# Altium PCB TG21_TX_Ma tran phim.PcbDoc (part 3 of 3)
Units mm, origin at the board's own origin, x right, y up, seen from the top; angles counter-clockwise.
Board outline 300 x 226.6 mm, 2 copper layers (Top Layer, Bottom Layer), stack 1.581 mm thick; 245 components, 229 nets, 914 pads, 4790 vias.
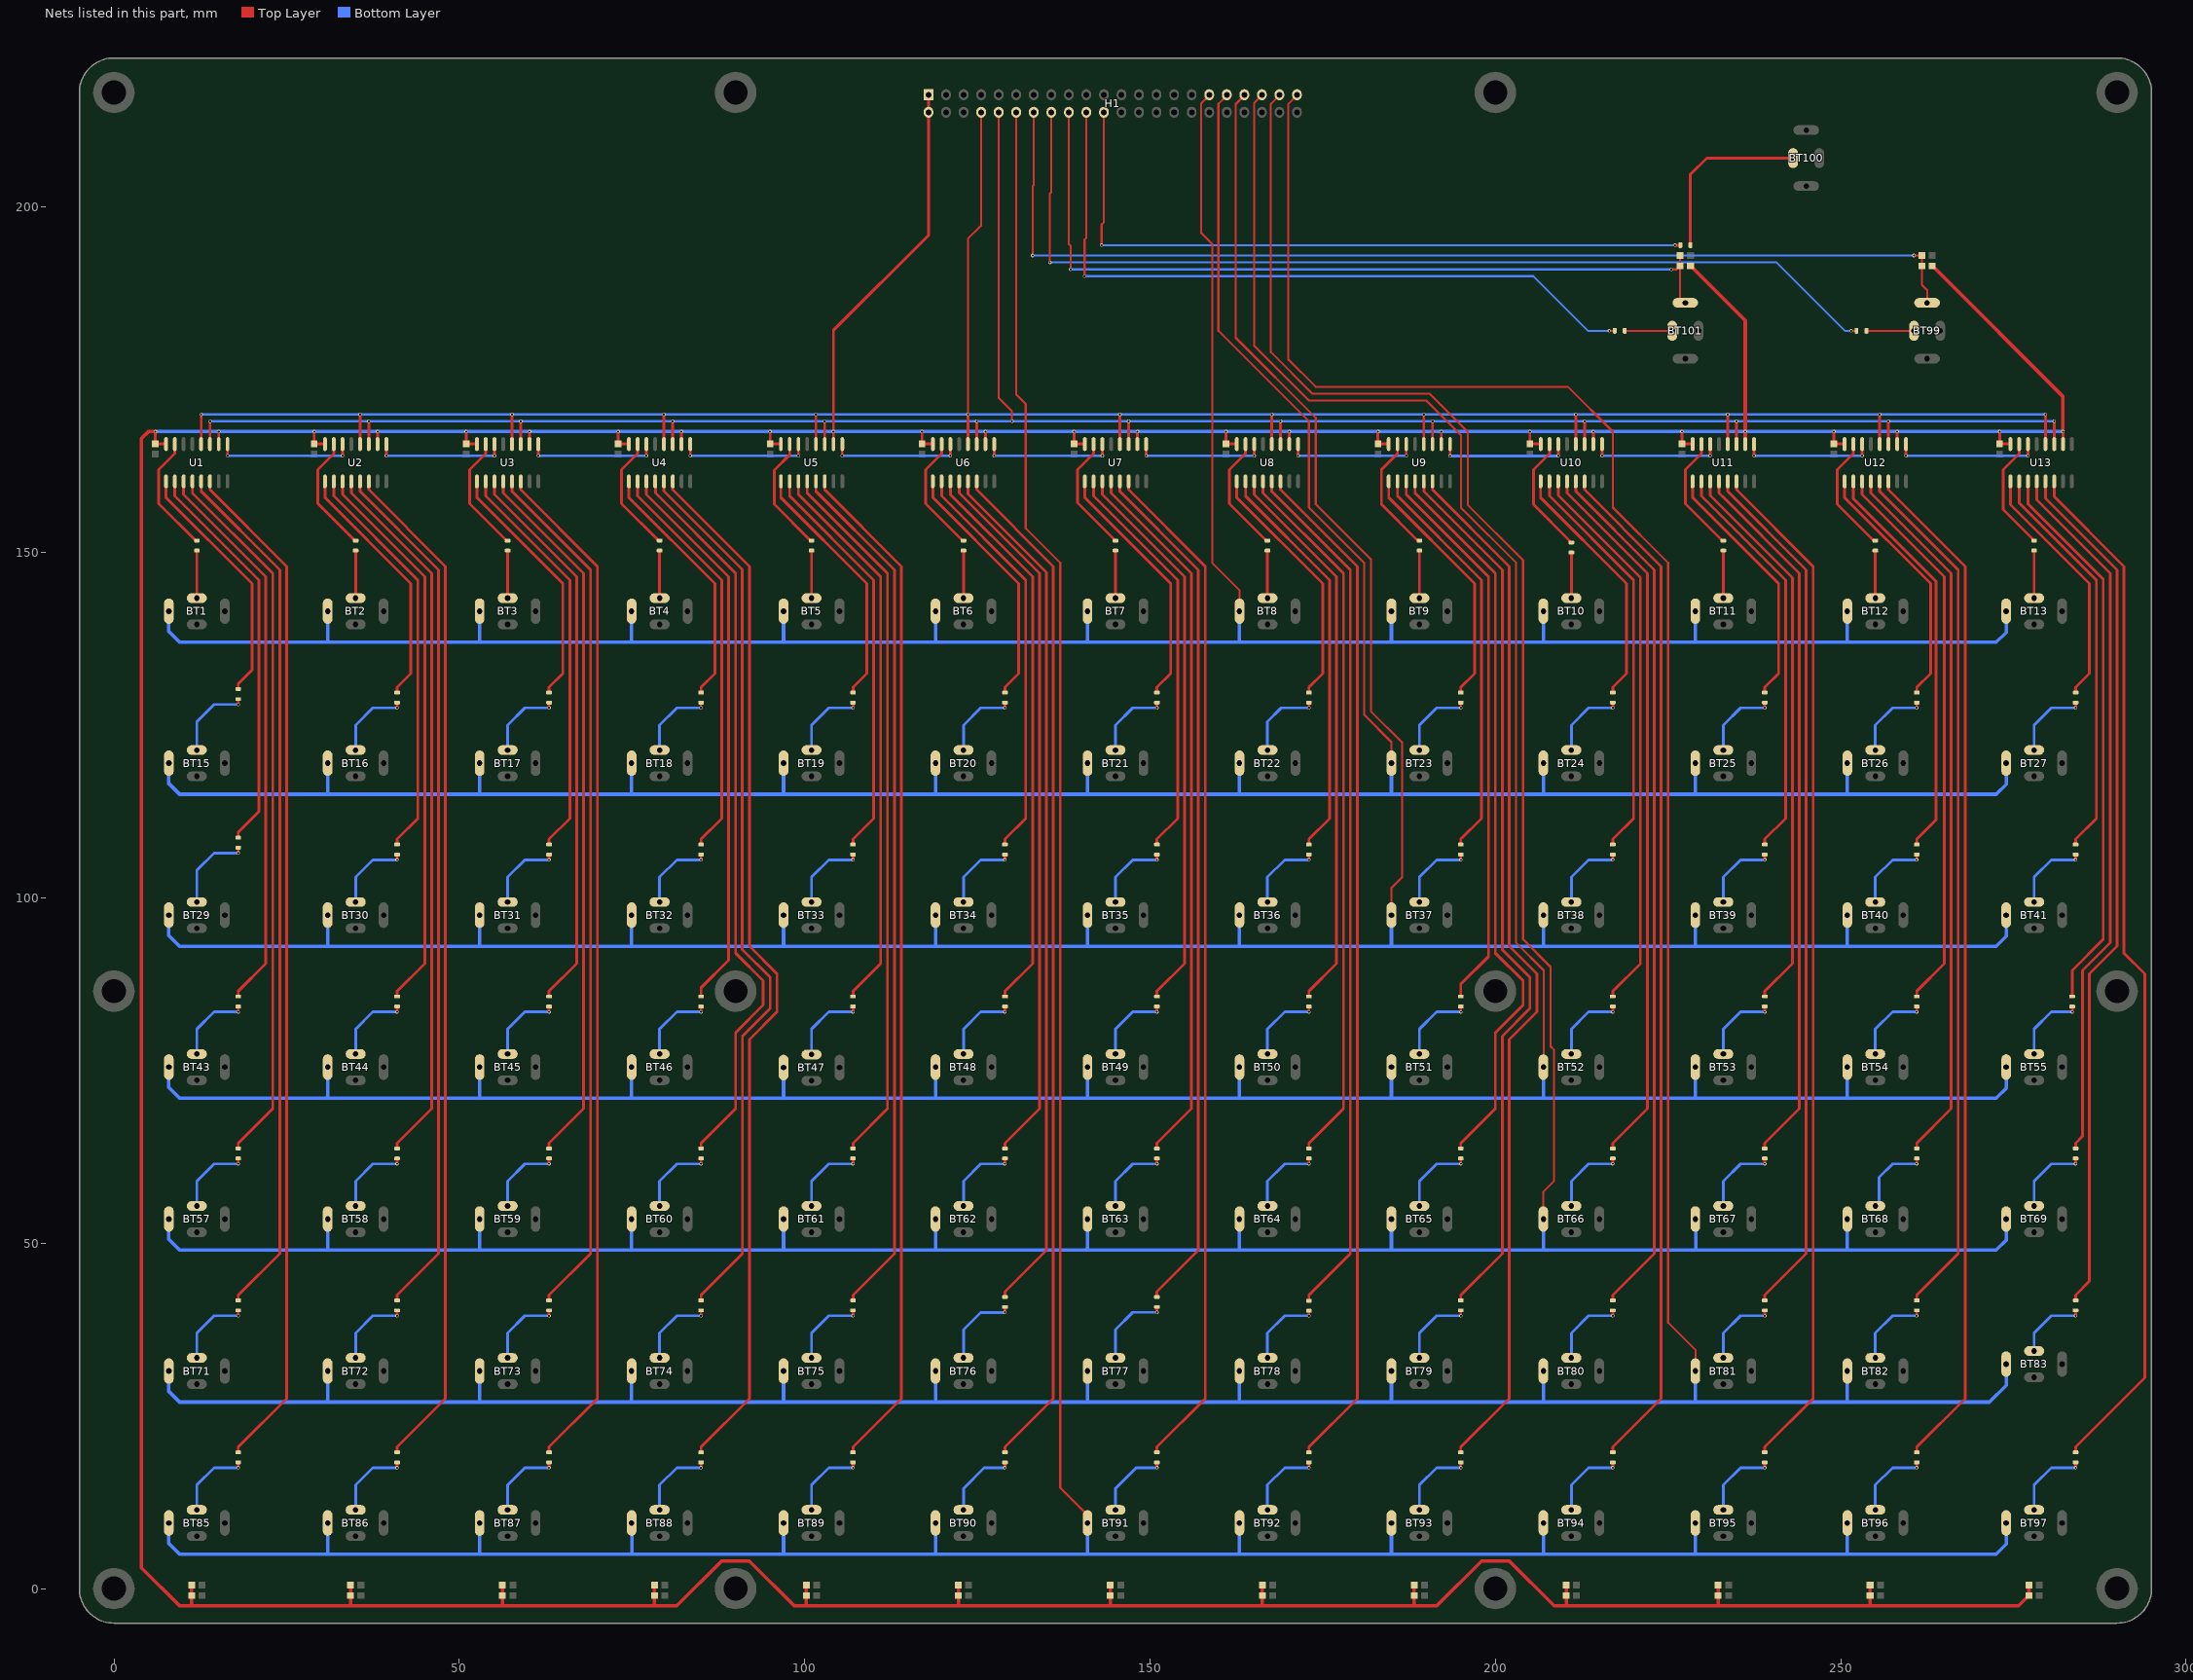
[diagram p3: the nets of this part, all layers, seen from the top]

## Via types
v1: diameter 0.5, hole 0.3, Top Layer to Bottom Layer, tented both sides, 4788 vias
v2: diameter 1.27, hole 0.711, Top Layer to Bottom Layer, tented both sides, 2 vias

## Nets (pads, with @x,y where several pads share a name; then routed paths per layer and width w, separated by ;. In a path a pad name is that pad's centre, name@x,y a point inside that pad or via, vN(x,y) a via of type N, cw(c..) or ccw(c..) an arc to the next point about the centre after c; other vN are vias at no path point) (continued)
H1: BT1.2 BT2.2 BT3.2 BT4.2 BT5.2 BT6.2 BT7.2 BT8.2 BT9.2 BT10.2 BT11.2 BT12.2 BT13.2 H1.33 | length 400.3
  Top Layer w0.3: H1.33@158.37,216.17 158.37,215.97 157.4,215 157.4,196.282 159,194.682 159,148.5 162.95,144.55 BT8.2@162.95,141.5
  Bottom Layer w0.5: BT1.2@7.95,141.5 7.95,138.55 9.5,137 30.911,137 ; BT2.2@30.95,141.5 30.95,137.039 30.911,137 ; BT3.2@52.95,141.5 52.95,137 ; BT4.2@74.95,141.5 74.95,137 ; BT5.2@96.95,141.5 96.95,137 ; BT6.2@118.95,141.5 118.95,137 ; BT7.2@140.95,141.5 140.95,137 ; BT8.2@162.95,141.5 162.95,137 ; BT9.2@184.95,141.5 184.95,137.098 184.852,137 ; BT10.2@206.95,141.5 206.95,137 ; BT11.2@228.95,141.5 228.95,137.097 228.853,137 ; BT12.2@250.95,141.5 250.95,137.129 250.821,137 ; BT13.2@273.95,141.5 273.95,138.45 272.5,137 250.821,137 ; 30.911,137 52.95,137 ; 52.95,137 74.95,137 ; 74.95,137 96.95,137 ; 96.95,137 118.95,137 ; 118.95,137 140.95,137 ; 140.95,137 162.95,137 ; 162.95,137 184.852,137 ; 184.852,137 206.95,137 ; 206.95,137 228.853,137 ; 228.853,137 250.821,137
H2: BT15.2 BT16.2 BT17.2 BT18.2 BT19.2 BT20.2 BT21.2 BT22.2 BT23.2 BT24.2 BT25.2 BT26.2 BT27.2 H1.35 | length 430.4
  Top Layer w0.3: H1.35@161.11,216.27 161.11,216.17 159.9,214.96 159.9,182.1 173,169 173,156.5 181,148.5 181,126.5 184.95,122.55 BT23.2@184.95,119.5
  Bottom Layer w0.5: BT15.2@7.95,119.5 7.95,116.55 9.5,115 30.95,115 ; BT16.2@30.95,119.5 30.95,115 ; BT17.2@52.95,119.5 52.95,115 ; BT18.2@74.95,119.5 74.95,115 ; BT19.2@96.95,119.5 96.95,115 ; BT20.2@118.95,119.5 118.95,115 ; BT21.2@140.95,119.5 140.95,115 ; BT22.2@162.95,119.5 162.95,115 ; BT23.2@184.95,119.5 184.95,115 ; BT24.2@206.95,119.5 206.95,115 ; BT25.2@228.95,119.5 228.95,115 ; BT26.2@250.95,119.5 250.95,115 ; BT27.2@273.95,119.5 273.95,116.45 272.5,115 250.95,115 ; 30.95,115 52.95,115 ; 52.95,115 74.95,115 ; 74.95,115 96.95,115 ; 96.95,115 118.95,115 ; 118.95,115 140.95,115 ; 140.95,115 162.95,115 ; 162.95,115 184.95,115 ; 184.95,115 206.95,115 ; 206.95,115 228.95,115 ; 228.95,115 250.95,115
H3: BT29.2 BT30.2 BT31.2 BT32.2 BT33.2 BT34.2 BT35.2 BT36.2 BT37.2 BT38.2 BT39.2 BT40.2 BT41.2 H1.37 | length 452.8
  Top Layer w0.3: H1.37@163.65,216.27 163.65,216.17 162.4,214.92 162.4,181.1 174,169.5 174,157 181.975,149.025 181.975,127.025 186.5,122.5 186.5,103 184.95,101.45 BT37.2@184.95,97.5
  Bottom Layer w0.5: BT29.2@7.95,97.5 7.95,94.55 9.5,93 30.95,93 ; BT30.2@30.95,97.5 30.95,93 ; BT31.2@52.95,97.5 52.95,93.063 53.013,93 ; BT32.2@74.95,97.5 74.95,93 ; BT33.2@96.95,97.5 96.95,93 ; BT34.2@118.95,97.5 118.95,93 ; BT35.2@140.95,97.5 140.95,93 ; BT36.2@162.95,97.5 162.95,93.071 162.879,93 ; BT37.2@184.95,97.5 184.95,93.142 184.808,93 ; BT38.2@206.95,97.5 206.95,93.098 206.852,93 ; BT39.2@228.95,97.5 228.95,93.076 228.874,93 ; BT40.2@250.95,97.5 250.95,93.001 250.949,93 ; BT41.2@273.95,97.5 273.95,94.45 272.5,93 250.949,93 ; 30.95,93 53.013,93 ; 53.013,93 74.95,93 ; 74.95,93 96.95,93 ; 96.95,93 118.95,93 ; 118.95,93 140.95,93 ; 140.95,93 162.879,93 ; 162.879,93 184.808,93 ; 184.808,93 206.852,93 ; 206.852,93 228.874,93 ; 228.874,93 250.949,93
H4: BT43.2 BT44.2 BT45.2 BT46.2 BT47.2 BT48.2 BT49.2 BT50.2 BT51.2 BT52.2 BT53.2 BT54.2 BT55.2 H1.39 | length 493.1
  Top Layer w0.3: H1.39@166.19,216.27 166.19,216.17 165.086,215.066 165.086,179.914 173,172 190,172 195,167 195,156.5 203,148.5 203,93.5 207,89.5 BT52.2@207,75
  Bottom Layer w0.5: BT43.2@7.95,75.5 7.95,72.55 9.5,71 30.95,71 ; BT44.2@30.95,75.5 30.95,71 ; BT45.2@52.95,75.5 52.95,71 ; BT46.2@74.95,75.5 74.95,71 ; BT47.2@96.95,75.43 96.95,71 ; BT48.2@118.95,75.5 118.95,71 ; BT49.2@140.95,75.5 140.95,71 ; BT50.2@162.686,76.574 162.686,75.516 BT50.2@162.922,75.28 ; BT50.2@162.95,75.5 162.95,71 ; BT51.2@184.95,75.5 184.95,71 ; BT52.2@206.95,75.5 206.95,71 ; BT53.2@228.95,75.5 228.95,71 ; BT54.2@250.95,75.5 250.95,71 ; BT55.2@273.95,75.5 273.95,72.45 272.5,71 250.95,71 ; 30.95,71 52.95,71 ; 52.95,71 74.95,71 ; 74.95,71 96.95,71 ; 96.95,71 118.95,71 ; 118.95,71 140.95,71 ; 140.95,71 162.95,71 ; 162.95,71 184.95,71 ; 184.95,71 206.95,71 ; 206.95,71 228.95,71 ; 228.95,71 250.95,71
H5: BT57.2 BT58.2 BT59.2 BT60.2 BT61.2 BT62.2 BT63.2 BT64.2 BT65.2 BT66.2 BT67.2 BT68.2 BT69.2 H1.41 | length 513.9
  Top Layer w0.3: H1.41@168.73,216.27 168.73,216.17 167.5,214.94 167.5,179 173.5,173 190.5,173 196,167.5 196,156.9 204,148.9 204,94 208,90 208,78.5 208.5,78 208.5,59 206.95,57.45 BT66.2@206.95,53.5
  Bottom Layer w0.5: BT57.2@7.95,53.5 7.95,50.55 9.5,49 30.95,49 ; BT58.2@30.95,53.5 30.95,49 ; BT59.2@52.95,53.5 52.95,49 ; BT60.2@74.95,53.5 74.95,49 ; BT61.2@96.95,53.5 96.95,49 ; BT62.2@118.95,53.5 118.95,49 ; BT63.2@140.95,53.5 140.95,49.312 140.638,49 ; BT64.2@162.95,53.5 162.95,49.039 162.911,49 ; BT65.2@184.95,53.5 184.95,49 ; BT66.2@206.95,53.5 206.95,49.017 206.933,49 ; BT67.2@228.95,53.5 229,53.45 229,49 ; BT68.2@250.95,53.5 250.95,49.205 250.745,49 ; BT69.2@273.95,53.5 274,53.45 274,50.5 272.5,49 250.745,49 ; 30.95,49 52.95,49 ; 52.95,49 74.95,49 ; 74.95,49 96.95,49 ; 96.95,49 118.95,49 ; 118.95,49 140.638,49 ; 140.638,49 162.911,49 ; 162.911,49 184.95,49 ; 184.95,49 206.933,49 ; 206.933,49 229,49 ; 229,49 250.745,49
H6: BT71.2 BT72.2 BT73.2 BT74.2 BT75.2 BT76.2 BT77.2 BT78.2 BT79.2 BT80.2 BT81.2 BT82.2 BT83.2 H1.43 | length 553.9
  Top Layer w0.3: H1.43@171.27,216.27 171.27,216.17 170,214.9 170,178 174,174 210.5,174 217,167.5 217,156.5 225,148.5 225,38.5 229,34.5 BT81.2@229,32
  Bottom Layer w0.5: BT71.2@7.95,31.5 7.95,28.55 9.5,27 30.95,27 ; BT72.2@30.95,31.5 30.95,27 ; BT73.2@52.95,31.5 52.95,27.033 52.983,27 ; BT74.2@74.95,31.5 74.95,27 ; BT75.2@96.95,31.5 96.95,27.129 96.821,27 ; BT76.2@118.95,31.5 118.95,27.052 118.898,27 ; BT77.2@140.95,31.5 140.95,27.025 140.975,27 ; BT78.2@162.95,31.5 162.95,27.044 162.994,27 ; BT79.2@184.95,31.5 184.95,27.103 184.847,27 ; BT80.2@206.95,31.5 206.95,27.01 206.94,27 ; BT81.2@228.95,31.5 228.95,27.029 228.979,27 ; BT82.2@250.95,31.5 250.95,27 ; BT83.2@273.95,32.5 273.95,29.45 271.5,27 250.95,27 ; 30.95,27 52.983,27 ; 52.983,27 74.95,27 ; 74.95,27 96.821,27 ; 96.821,27 118.898,27 ; 118.898,27 140.975,27 ; 140.975,27 162.994,27 ; 162.994,27 184.847,27 ; 184.847,27 206.94,27 ; 206.94,27 228.979,27 ; 228.979,27 250.95,27
H7: BT85.2 BT86.2 BT87.2 BT88.2 BT89.2 BT90.2 BT91.2 BT92.2 BT93.2 BT94.2 BT95.2 BT96.2 BT97.2 H1.12 | length 532.7
  Top Layer w0.3: H1.12@130.63,213.73 130.63,172.87 132,171.5 132,153.5 137,148.5 137,14.6 140.95,10.65 BT91.2@140.95,9.5
  Bottom Layer w0.5: BT85.2@7.95,9.5 7.95,6.55 9.5,5 30.95,5 ; BT86.2@30.95,9.5 30.95,5 ; BT87.2@52.95,9.5 52.95,5 ; BT88.2@75,10.931 75,5 ; BT89.2@96.95,9.5 96.95,5 ; BT90.2@118.95,9.5 118.95,5 ; BT91.2@140.95,9.5 140.95,5 ; BT92.2@162.95,9.5 162.95,5 ; BT93.2@184.95,9.5 184.95,5.063 184.887,5 ; BT94.2@206.95,9.5 206.95,5.05 207,5 ; BT95.2@228.95,9.5 228.95,5 ; BT96.2@250.95,9.5 250.95,5.053 250.897,5 ; BT97.2@273.95,9.5 273.95,6.45 272.5,5 250.897,5 ; 30.95,5 52.95,5 ; 52.95,5 75,5 ; 75,5 96.95,5 ; 96.95,5 118.95,5 ; 118.95,5 140.95,5 ; 140.95,5 162.95,5 ; 162.95,5 184.887,5 ; 184.887,5 207,5 ; 207,5 228.95,5 ; 228.95,5 250.897,5
L1: R14.1 U1.15 | length 17.3
  Top Layer w0.4: U1.15@8.825,165.7 8.825,164.325 6.5,162 6.5,157.09 11.865,151.725 R14.1@12,151.725
L2: R28.1 U1.1 | length 36.1
  Top Layer w0.4: U1.1@7.555,160.3 7.555,157.945 20,145.5 20,133 18,131 R28.1@18,130.225
L3: R42.1 U1.2 | length 57.9
  Top Layer w0.4: U1.2@8.825,160.3 8.825,158.175 21,146 21,112.5 18,109.5 R42.1@18,108.725
L4: R56.1 U1.3 | length 81.2
  Top Layer w0.4: U1.3@10.095,160.3 10.095,158.405 22,146.5 22,90.5 18,86.5 R56.1@18,85.725
L5: R70.1 U1.4 | length 103.5
  Top Layer w0.4: U1.4@11.365,160.3 11.365,158.635 23,147 23,69.5 18,64.5 R70.1@18,63.725
L6: R84.1 U1.5 | length 125.8
  Top Layer w0.4: U1.5@12.635,160.3 12.635,158.865 24,147.5 24,48.5 18,42.5 R84.1@18,41.725
L7: R98.1 U1.6 | length 148.1
  Top Layer w0.4: U1.6@13.905,160.3 13.905,159.095 25,148 25,27.5 18,20.5 R98.1@18,19.725
L8: R1.2 U2.15 | length 17.3
  Top Layer w0.4: U2.15@31.825,165.7 31.825,164.325 29.5,162 29.5,157.111 34.79,151.821 34.79,151.8 34.865,151.725 R1.2@35,151.725
L9: R15.2 U2.1 | length 36.6
  Top Layer w0.4: U2.1@30.555,160.3 30.555,157.945 43,145.5 43,132.5 41,130.5 R15.2@41,129.725
L10: R29.2 U2.2 | length 58.9
  Top Layer w0.4: U2.2@31.825,160.3 31.825,158.175 44,146 44,111.5 41,108.5 R29.2@41,107.725
L11: R43.2 U2.3 | length 81.2
  Top Layer w0.4: U2.3@33.095,160.3 33.095,158.405 45,146.5 45,90.5 41,86.5 R43.2@41,85.725
L12: R57.2 U2.4 | length 103.5
  Top Layer w0.4: U2.4@34.365,160.3 34.365,158.635 46,147 46,69.5 41,64.5 R57.2@41,63.725
L13: R71.2 U2.5 | length 125.8
  Top Layer w0.4: U2.5@35.635,160.3 35.635,158.865 47,147.5 47,48.5 41,42.5 R71.2@41,41.725
L14: R85.2 U2.6 | length 148.1
  Top Layer w0.4: U2.6@36.905,160.3 36.905,159.095 48,148 48,27.5 41,20.5 R85.2@41,19.725
L15: R2.2 U3.15 | length 17.3
  Top Layer w0.4: U3.15@53.825,165.7 53.825,164.325 51.5,162 51.5,157.09 56.865,151.725 R2.2@57,151.725
L16: R16.2 U3.1 | length 36.6
  Top Layer w0.4: U3.1@52.555,160.3 52.555,157.945 65,145.5 65,132.5 63,130.5 R16.2@63,129.725
L17: R30.2 U3.2 | length 58.9
  Top Layer w0.4: U3.2@53.825,160.3 53.825,158.175 66,146 66,111.5 63,108.5 R30.2@63,107.725
L18: R44.2 U3.3 | length 81.2
  Top Layer w0.4: U3.3@55.095,160.3 55.095,158.405 67,146.5 67,90.5 63,86.5 R44.2@63,85.725
L19: R58.2 U3.4 | length 103.5
  Top Layer w0.4: U3.4@56.365,160.3 56.365,158.635 68,147 68,69.5 63,64.5 R58.2@63,63.725
L20: R72.2 U3.5 | length 125.8
  Top Layer w0.4: U3.5@57.635,160.3 57.635,158.865 69,147.5 69,48.5 63,42.5 R72.2@63,41.725
L21: R86.2 U3.6 | length 148.1
  Top Layer w0.4: U3.6@58.905,160.3 58.905,159.095 70,148 70,27.5 63,20.5 R86.2@63,19.725
L22: R3.2 U4.15 | length 17.3
  Top Layer w0.4: U4.15@75.825,165.7 75.825,164.325 73.5,162 73.5,157.09 78.865,151.725 R3.2@79,151.725
L23: R17.2 U4.1 | length 36.6
  Top Layer w0.4: U4.1@74.555,160.3 74.555,159.945 74.555,157.945 87,145.5 87,132.5 85.015,130.515 85.015,129.8 85,129.785 R17.2@85,129.725
L24: R31.2 U4.2 | length 59.1
  Top Layer w0.4: U4.2@75.825,160.3 75.825,160.175 75.825,158.175 88,146 88,111.5 85,108.5 R31.2@85,107.725 85.135,107.725 R31.2@85.21,107.65
L25: R45.2 U4.3 | length 81.2
  Top Layer w0.4: U4.3@77.095,160.3 77.095,158.405 89,146.5 89,91 85,87 R45.2@85,85.725
L26: R59.2 U4.4 | length 106.8
  Top Layer w0.4: U4.4@78.365,160.3 78.394,160.271 78.394,158.606 90,147 90,92 94,88 94,84.5 90,80.5 90,69.5 85,64.5 R59.2@85,63.725
L27: R73.2 U4.5 | length 129.1
  Top Layer w0.4: U4.5@79.635,160.3 79.613,160.278 79.613,158.887 90.95,147.55 90.95,92.55 95,88.5 95,84 91,80 91,48.5 85,42.5 R73.2@85,41.725
L28: R87.2 U4.6 | length 151.4
  Top Layer w0.4: U4.6@80.905,160.3 80.905,159.095 92,148 92,93 96,89 96,83.5 92,79.5 92,27.5 85,20.5 R87.2@85,19.725
L29: R4.2 U5.15 | length 17.2
  Top Layer w0.4: U5.15@97.825,165.7 97.825,164.145 95.59,161.91 95.59,157 100.865,151.725 R4.2@101,151.725
L30: R18.2 U5.1 | length 36.6
  Top Layer w0.4: U5.1@96.555,160.3 96.555,157.945 109,145.5 109,132.5 107,130.5 R18.2@107,129.725
L31: R32.2 U5.2 | length 58.9
  Top Layer w0.4: U5.2@97.825,160.3 97.825,158.175 110,146 110,111.5 107,108.5 R32.2@107,107.725
L32: R46.2 U5.3 | length 81.2
  Top Layer w0.4: U5.3@99.095,160.3 99.095,158.405 111,146.5 111,90.5 107,86.5 107,86 R46.2@107,85.725
L33: R60.2 U5.4 | length 103.5
  Top Layer w0.4: U5.4@100.365,160.3 100.365,158.635 112,147 112,69.5 107,64.5 R60.2@107,63.725
L34: R74.2 U5.5 | length 125.8
  Top Layer w0.4: U5.5@101.635,160.3 101.635,158.865 113,147.5 113,48.5 107,42.5 R74.2@107,41.725
L35: R88.2 U5.6 | length 148.1
  Top Layer w0.4: U5.6@102.905,160.3 102.905,159.095 114,148 114,27.5 107,20.5 R88.2@107,19.725
L36: R5.2 U6.15 | length 17.3
  Top Layer w0.4: U6.15@119.825,165.7 119.825,164.325 117.5,162 117.5,157.09 122.865,151.725 R5.2@123,151.725
L37: R19.2 U6.1 | length 36.6
  Top Layer w0.4: U6.1@118.555,160.3 118.555,157.945 131,145.5 131,132.5 129,130.5 R19.2@129,129.725
L38: R33.2 U6.2 | length 58.9
  Top Layer w0.4: U6.2@119.825,160.3 119.825,158.175 132,146 132,111.5 129,108.5 R33.2@129,107.725
L39: R47.2 U6.3 | length 81.2
  Top Layer w0.4: U6.3@121.095,160.3 121.124,160.271 121.124,158.376 133,146.5 133,90.5 129,86.5 R47.2@129,85.725
L40: R61.2 U6.4 | length 103.5
  Top Layer w0.4: U6.4@122.365,160.3 122.365,158.635 134,147 134,69.5 129,64.5 R61.2@129,63.725
L41: R75.2 U6.5 | length 125.3
  Top Layer w0.4: U6.5@123.635,160.3 123.635,158.496 135,147.131 135,49 129,43 R75.2@129,42.225
L42: R89.2 U6.6 | length 148.1
  Top Layer w0.4: U6.6@124.905,160.3 124.905,159.095 136,148 136,27.5 129,20.5 R89.2@129,19.725
L43: R6.2 U7.15 | length 17.3
  Top Layer w0.4: U7.15@141.825,165.7 141.825,164.325 139.5,162 139.5,157.225 144.79,151.935 144.79,151.8 144.865,151.725 R6.2@145,151.725
L44: R20.2 U7.1 | length 36.6
  Top Layer w0.4: U7.1@140.555,160.3 140.555,157.945 153,145.5 153,132.5 151,130.5 R20.2@151,129.725
L45: R34.2 U7.2 | length 58.9
  Top Layer w0.4: U7.2@141.825,160.3 141.825,158.175 154,146 154,111.5 151,108.5 R34.2@151,107.725
L46: R48.2 U7.3 | length 81.2
  Top Layer w0.4: U7.3@143.095,160.3 143.095,158.405 155,146.5 155,90.5 151,86.5 R48.2@151,85.725
L47: R62.2 U7.4 | length 103.5
  Top Layer w0.4: U7.4@144.365,160.3 144.365,158.635 156,147 156,69.5 151,64.5 R62.2@151,63.725
L48: R76.2 U7.5 | length 125.3
  Top Layer w0.4: U7.5@145.635,160.3 145.635,158.865 157,147.5 157,49 151,43 R76.2@151,42.225
L49: R90.2 U7.6 | length 148.1
  Top Layer w0.4: U7.6@146.905,160.3 146.905,159.095 158,148 158,27.5 151,20.5 R90.2@151,19.725
L50: R7.2 U8.15 | length 17.3
  Top Layer w0.4: U8.15@163.825,165.7 163.825,164.325 161.5,162 161.5,157.09 166.865,151.725 R7.2@167,151.725
L51: R21.2 U8.1 | length 36.6
  Top Layer w0.4: U8.1@162.555,160.3 162.555,157.945 175,145.5 175,132.5 173,130.5 R21.2@173,129.725
L52: R35.2 U8.2 | length 58.9
  Top Layer w0.4: U8.2@163.825,160.3 163.844,160.281 163.844,158.156 176,146 176,111.5 173,108.5 R35.2@173,107.725
L53: R49.2 U8.3 | length 81.2
  Top Layer w0.4: U8.3@165.095,160.3 165.095,158.405 177,146.5 177,90.5 173,86.5 R49.2@173,85.725
L54: R63.2 U8.4 | length 103.5
  Top Layer w0.4: U8.4@166.365,160.3 166.365,158.635 178,147 178,69.5 173,64.5 R63.2@173,63.725
L55: R77.2 U8.5 | length 125.8
  Top Layer w0.4: U8.5@167.635,160.3 167.635,158.865 179,147.5 179,48.5 173,42.5 R77.2@173,41.681
L56: R91.2 U8.6 | length 148.1
  Top Layer w0.4: U8.6@168.905,160.3 168.905,159.095 180,148 180,27.5 173,20.5 R91.2@173,19.725
L57: R8.2 U9.15 | length 17.3
  Top Layer w0.4: U9.15@185.825,165.7 185.825,164.325 183.5,162 183.5,157 188.7,151.8 188.925,151.8 R8.2@189,151.725
L58: R22.2 U9.1 | length 36.6
  Top Layer w0.4: U9.1@184.555,160.3 184.555,157.945 197,145.5 197,132.5 195,130.5 R22.2@195,129.725
L59: R36.2 U9.2 | length 58.9
  Top Layer w0.4: U9.2@185.825,160.3 185.825,158.175 198,146 198,111.5 195,108.5 R36.2@195,107.725
L60: R50.2 U9.3 | length 81.2
  Top Layer w0.4: U9.3@187.095,160.3 187.095,158.405 199,146.5 199,91.5 195,87.5 R50.2@195,85.725
L61: R64.2 U9.4 | length 106.8
  Top Layer w0.4: U9.4@188.365,160.3 188.365,158.635 200,147 200,92 204,88 204,84.5 200,80.5 200,69.5 195,64.5 R64.2@195,63.75
L62: R78.2 U9.5 | length 129.1
  Top Layer w0.4: U9.5@189.635,160.3 189.664,160.271 189.664,158.836 201,147.5 201,92.5 205,88.5 205,84 201,80 201,48.5 195,42.5 R78.2@195,41.725
L63: R92.2 U9.6 | length 151.4
  Top Layer w0.4: U9.6@190.905,160.3 190.905,159.095 202,148 202,93 206,89 206,83.5 202,79.5 202,27.5 195,20.5 R92.2@195,19.725
L64: R9.2 U10.15 | length 17.6
  Top Layer w0.4: U10.15@207.825,165.7 207.825,164.325 205.5,162 205.5,156.95 210.79,151.66 210.79,151.525 210.865,151.45 R9.2@211,151.45
L65: R23.2 U10.1 | length 36.6
  Top Layer w0.4: U10.1@206.555,160.3 206.555,157.945 219,145.5 219,132.5 217,130.5 R23.2@217,129.725
L66: R37.2 U10.2 | length 58.9
  Top Layer w0.4: U10.2@207.825,160.3 207.825,158.175 220,146 220,111.5 217,108.5 R37.2@217,107.725
L67: R51.2 U10.3 | length 81.2
  Top Layer w0.4: U10.3@209.095,160.3 209.095,158.274 221,146.369 221,90.5 217,86.5 R51.2@217,85.725
L68: R65.2 U10.4 | length 103.5
  Top Layer w0.4: U10.4@210.365,160.3 210.365,158.635 222,147 222,69.5 217,64.5 R65.2@217,63.725
L69: R79.2 U10.5 | length 125.8
  Top Layer w0.4: U10.5@211.635,160.3 211.635,158.865 223,147.5 223,48.5 217,42.5 R79.2@217,41.725
L70: R93.2 U10.6 | length 148.1
  Top Layer w0.4: U10.6@212.905,160.3 212.905,159.095 224,148 224,27.5 217,20.5 R93.2@217,19.725
L71: R10.2 U11.15 | length 17.3
  Top Layer w0.4: U11.15@229.825,165.7 229.825,164.325 227.5,162 227.5,157.09 232.865,151.725 R10.2@233,151.725
L72: R24.2 U11.1 | length 36.6
  Top Layer w0.4: U11.1@228.555,160.3 228.555,157.945 241,145.5 241,132.5 239,130.5 R24.2@239,129.725
L73: R38.2 U11.2 | length 58.9
  Top Layer w0.4: U11.2@229.825,160.3 229.825,158.175 242,146 242,111.5 239,108.5 R38.2@239,107.725
L74: R52.2 U11.3 | length 81.2
  Top Layer w0.4: U11.3@231.095,160.3 231.095,158.274 243,146.369 243,90.5 239,86.5 R52.2@239,85.725
L75: R66.2 U11.4 | length 103.5
  Top Layer w0.4: U11.4@232.365,160.3 232.365,158.635 233.335,157.665 244,147 244,69.5 239,64.5 R66.2@239,63.725
L76: R80.2 U11.5 | length 125.8
  Top Layer w0.4: U11.5@233.635,160.3 233.635,158.865 245,147.5 245,48.5 239,42.5 R80.2@239,41.725
L77: R94.2 U11.6 | length 148.1
  Top Layer w0.4: U11.6@234.905,160.3 234.905,159.095 246,148 246,27.5 239,20.5 R94.2@239,19.725
L78: R11.2 U12.15 | length 17.3
  Top Layer w0.4: U12.15@251.825,165.7 251.825,164.325 249.5,162 249.5,157 254.7,151.8 254.925,151.8 R11.2@255,151.725
L79: R25.2 U12.1 | length 36.6
  Top Layer w0.4: U12.1@250.555,160.3 250.555,159.945 250.555,157.945 263,145.5 263,132.5 261,130.5 R25.2@261,129.725
L80: R39.2 U12.2 | length 58.7
  Top Layer w0.4: U12.2@251.825,160.3 251.825,157.806 263.8,145.831 263.8,111.3 261,108.5 R39.2@261,107.725
L81: R53.2 U12.3 | length 81.2
  Top Layer w0.4: U12.3@253.095,160.3 253.095,158.405 265,146.5 265,90.5 261,86.5 R53.2@261,85.725
L82: R67.2 U12.4 | length 103.5
  Top Layer w0.4: U12.4@254.365,160.3 254.365,158.635 266,147 266,69.5 261,64.5 R67.2@261,63.725
L83: R81.2 U12.5 | length 125.8
  Top Layer w0.4: U12.5@255.635,160.3 255.635,158.865 267,147.5 267,48.5 261,42.5 R81.2@261,41.725
L84: R95.2 U12.6 | length 148.1
  Top Layer w0.4: U12.6@256.905,160.3 256.905,159.095 268,148 268,27.5 261,20.5 R95.2@261,19.725
L85: R12.2 U13.15 | length 16.9
  Top Layer w0.4: U13.15@275.825,165.7 275.825,164.325 273.5,162 273.5,156.225 277.79,151.935 277.79,151.8 277.865,151.725 R12.2@278,151.725
L86: R26.2 U13.1 | length 36.1
  Top Layer w0.4: U13.1@274.555,160.3 274.555,156.945 286,145.5 286,132.5 284,130.5 R26.2@284,129.725
L87: R40.2 U13.2 | length 58.4
  Top Layer w0.4: U13.2@275.825,160.3 275.825,157.175 287,146 287,111.5 284,108.5 R40.2@284,107.725
L88: R54.2 U13.3 | length 81
  Top Layer w0.4: U13.3@277.095,160.3 277.095,157.036 288,146.131 288,94 283.5,89.5 R54.2@283.5,85.725
L89: R68.2 U13.4 | length 103.1
  Top Layer w0.4: U13.4@278.365,160.3 278.365,157.635 289,147 289,93.5 285,89.5 285,65.5 284,64.5 R68.2@284,63.725
L90: R82.2 U13.5 | length 125.4
  Top Layer w0.4: U13.5@279.635,160.3 279.635,157.865 289.5,148 290,147.5 290,93 286,89 286,44.5 284,42.5 R82.2@284,41.725
L91: R96.2 U13.6 | length 150.1
  Top Layer w0.4: U13.6@280.905,160.3 280.905,158.095 291,148 291,92 294,89 294,30.5 284,20.5 R96.2@284,19.725
LED_PW: H1.22 R115.2 | length 103.1
  Top Layer w0.3: v1(143,194.5) 143,197.5 143.33,197.83 H1.22@143.33,213.73
  Top Layer w0.4: v1(226,194.5) R115.2@226.775,194.5
  Bottom Layer w0.3: v1(143,194.5) v1(226,194.5)
LED_SET: H1.16 R114.2 | length 142.7
  Top Layer w0.3: v1(135.5,191.993) 135.5,201.956 135.71,202.166 H1.16@135.71,213.73 ; v1(251.5,182.1) R114.2@252.275,182.1
  Bottom Layer w0.3: v1(135.5,191.993) 240.707,191.993 250.6,182.1 v1(251.5,182.1)
LED_STOP: H1.20 R117.2 | length 103.9
  Top Layer w0.3: v1(140.521,190) 140.521,195.321 140.79,195.59 H1.20@140.79,213.73 ; v1(216.5,182.1) R117.2@217.275,182.1
  Bottom Layer w0.3: v1(140.521,190) 205.5,190 213.4,182.1 v1(216.5,182.1)
NetBT1_3: BT1.3 R14.2 | length 6.9
  Top Layer w0.4: BT1.3@12,143.4 12,150.2 R14.2@12,150.275
NetBT2_3: BT2.3 R1.1 | length 6.9
  Top Layer w0.4: BT2.3@35,143.4 R1.1@35,150.275
NetBT3_3: BT3.3 R2.1 | length 6.9
  Top Layer w0.4: BT3.3@57,143.4 R2.1@57,150.275
NetBT4_3: BT4.3 R3.1 | length 6.9
  Top Layer w0.4: BT4.3@79,143.4 R3.1@79,150.275
NetBT5_3: BT5.3 R4.1 | length 6.9
  Top Layer w0.4: BT5.3@101,143.4 R4.1@101,150.275
NetBT6_3: BT6.3 R5.1 | length 6.9
  Top Layer w0.4: BT6.3@123,143.4 R5.1@123,150.275
NetBT7_3: BT7.3 R6.1 | length 6.9
  Top Layer w0.4: BT7.3@145,143.4 R6.1@145,150.275
NetBT8_3: BT8.3 R7.1 | length 6.9
  Top Layer w0.4: BT8.3@167,143.4 R7.1@167,150.275
NetBT9_3: BT9.3 R8.1 | length 6.9
  Top Layer w0.4: BT9.3@189,143.4 R8.1@189,150.275
NetBT10_3: BT10.3 R9.1 | length 6.6
  Top Layer w0.4: BT10.3@211,143.4 211,146.893 R9.1@211,150
NetBT11_3: BT11.3 R10.1 | length 6.8
  Top Layer w0.4: BT11.3@233,143.5 R10.1@233,150.275
NetBT12_3: BT12.3 R11.1 | length 6.9
  Top Layer w0.4: BT12.3@255,143.4 R11.1@255,150.275
NetBT13_3: BT13.3 R12.1 | length 6.9
  Top Layer w0.4: BT13.3@278,143.4 R12.1@278,150.275
NetBT15_3: BT15.3 R28.2 | length 11.9
  Top Layer w0.4: v1(18,128) R28.2@18,128.775
  Bottom Layer w0.4: BT15.3@12,121.4 12,125.5 14.5,128 v1(18,128)
NetBT16_3: BT16.3 R15.1 | length 11.4
  Top Layer w0.4: v1(41,127.5) R15.1@41,128.275
  Bottom Layer w0.4: BT16.3@35,121.4 35,125 37.5,127.5 v1(41,127.5)
NetBT17_3: BT17.3 R16.1 | length 11.4
  Top Layer w0.4: v1(63,127.5) R16.1@63,128.275
  Bottom Layer w0.4: BT17.3@57,121.4 57,125 59.5,127.5 v1(63,127.5)
NetBT18_3: BT18.3 R17.1 | length 11.4
  Top Layer w0.4: v1(85,127.5) R17.1@85,128.275
  Bottom Layer w0.4: BT18.3@79,121.4 79,125 81.5,127.5 v1(85,127.5)
NetBT19_3: BT19.3 R18.1 | length 11.4
  Top Layer w0.4: v1(107,127.5) R18.1@107,128.275
  Bottom Layer w0.4: BT19.3@101,121.4 101,125 103.5,127.5 v1(107,127.5)
NetBT20_3: BT20.3 R19.1 | length 11.4
  Top Layer w0.4: v1(129,127.5) R19.1@129,128.275
  Bottom Layer w0.4: BT20.3@123,121.4 123,125 125.5,127.5 v1(129,127.5)
NetBT21_3: BT21.3 R20.1 | length 11.4
  Top Layer w0.4: v1(151,127.5) R20.1@151,128.275
  Bottom Layer w0.4: BT21.3@145,121.4 145,125 147.5,127.5 v1(151,127.5)
NetBT22_3: BT22.3 R21.1 | length 11.7
  Top Layer w0.4: v1(173,127.5) R21.1@173,128.275
  Bottom Layer w0.4: BT22.3@167,121.4 167,125.5 169,127.5 v1(173,127.5)
NetBT23_3: BT23.3 R22.1 | length 11.4
  Top Layer w0.4: v1(195,127.5) R22.1@195,128.275
  Bottom Layer w0.4: BT23.3@189,121.4 189,125 191.5,127.5 v1(195,127.5)
NetBT24_3: BT24.3 R23.1 | length 11.4
  Top Layer w0.4: v1(217,127.5) R23.1@217,128.275
  Bottom Layer w0.4: BT24.3@211,121.4 211,125 213.5,127.5 v1(217,127.5)
NetBT25_3: BT25.3 R24.1 | length 11.4
  Top Layer w0.4: v1(239,127.5) R24.1@239,128.275
  Bottom Layer w0.4: BT25.3@233,121.4 233,125 235.5,127.5 v1(239,127.5)
NetBT26_3: BT26.3 R25.1 | length 11.4
  Top Layer w0.4: v1(261,127.5) R25.1@261,128.275
  Bottom Layer w0.4: BT26.3@255,121.4 255,125 257.5,127.5 v1(261,127.5)
NetBT27_3: BT27.3 R26.1 | length 11.4
  Top Layer w0.4: v1(284,127.5) R26.1@284,128.275
  Bottom Layer w0.4: BT27.3@278,121.4 278,125 280.5,127.5 v1(284,127.5)
NetBT29_3: BT29.3 R42.2 | length 12.4
  Top Layer w0.4: v1(18,106.5) R42.2@18,107.275
  Bottom Layer w0.4: BT29.3@12,99.4 12,104 14.5,106.5 v1(18,106.5)
NetBT30_3: BT30.3 R29.1 | length 11.4
  Top Layer w0.4: v1(41,105.5) R29.1@41,106.275
  Bottom Layer w0.4: BT30.3@35,99.4 35,103 37.5,105.5 v1(41,105.5)
NetBT31_3: BT31.3 R30.1 | length 11.4
  Top Layer w0.4: v1(63,105.5) R30.1@63,106.275
  Bottom Layer w0.4: BT31.3@57,99.4 57,103 59.5,105.5 v1(63,105.5)
NetBT32_3: BT32.3 R31.1 | length 11.4
  Top Layer w0.4: v1(85,105.5) R31.1@85,106.275
  Bottom Layer w0.4: BT32.3@79,99.4 79,103 81.5,105.5 v1(85,105.5)
NetBT33_3: BT33.3 R32.1 | length 11.4
  Top Layer w0.4: v1(107,105.5) R32.1@107,106.275
  Bottom Layer w0.4: BT33.3@101,99.4 101,103 103.5,105.5 v1(107,105.5)
NetBT34_3: BT34.3 R33.1 | length 11.4
  Top Layer w0.4: v1(129,105.5) R33.1@129,106.275
  Bottom Layer w0.4: BT34.3@123,99.4 123,103 125.5,105.5 v1(129,105.5)
NetBT35_3: BT35.3 R34.1 | length 11.4
  Top Layer w0.4: v1(151,105.5) R34.1@151,106.275
  Bottom Layer w0.4: BT35.3@145,99.4 145,103 147.5,105.5 v1(151,105.5)
NetBT36_3: BT36.3 R35.1 | length 11.4
  Top Layer w0.4: v1(173,105.5) R35.1@173,106.275
  Bottom Layer w0.4: BT36.3@167,99.4 167,103 169.5,105.5 v1(173,105.5)
NetBT37_3: BT37.3 R36.1 | length 11.4
  Top Layer w0.4: v1(195,105.5) R36.1@195,106.275
  Bottom Layer w0.4: BT37.3@189,99.4 189,103 191.5,105.5 v1(195,105.5)
NetBT38_3: BT38.3 R37.1 | length 11.4
  Top Layer w0.4: v1(217,105.5) R37.1@217,106.275
  Bottom Layer w0.4: BT38.3@211,99.4 211,103 213.5,105.5 v1(217,105.5)
NetBT39_3: BT39.3 R38.1 | length 11.4
  Top Layer w0.4: v1(239,105.5) R38.1@239,106.275
  Bottom Layer w0.4: BT39.3@233,99.4 233,103 235.5,105.5 v1(239,105.5)
NetBT40_3: BT40.3 R39.1 | length 11.4
  Top Layer w0.4: v1(261,105.5) R39.1@261,106.275
  Bottom Layer w0.4: BT40.3@255,99.4 255,103 257.5,105.5 v1(261,105.5)
NetBT41_3: BT41.3 R40.1 | length 11.4
  Top Layer w0.4: v1(284,105.5) R40.1@284,106.275
  Bottom Layer w0.4: BT41.3@278,99.4 278,103 280.5,105.5 v1(284,105.5)
NetBT43_3: BT43.3 R56.2 | length 11.4
  Top Layer w0.4: v1(18,83.5) R56.2@18,84.275
  Bottom Layer w0.4: BT43.3@12,77.4 12,81 14.5,83.5 v1(18,83.5)
NetBT44_3: BT44.3 R43.1 | length 11.4
  Top Layer w0.4: v1(41,83.5) R43.1@41,84.275
  Bottom Layer w0.4: BT44.3@35,77.4 35,81 37.5,83.5 v1(41,83.5)
NetBT45_3: BT45.3 R44.1 | length 11.4
  Top Layer w0.4: v1(63,83.5) R44.1@63,84.275
  Bottom Layer w0.4: BT45.3@57,77.4 57,81 59.5,83.5 v1(63,83.5)
NetBT46_3: BT46.3 R45.1 | length 11.4
  Top Layer w0.4: v1(85,83.5) R45.1@85,84.275
  Bottom Layer w0.4: BT46.3@79,77.4 79,81 81.5,83.5 v1(85,83.5)
NetBT47_3: BT47.3 R46.1 | length 11.5
  Top Layer w0.4: v1(107,83.5) R46.1@107,84.275
  Bottom Layer w0.4: BT47.3@101,77.33 101,81 103.5,83.5 v1(107,83.5)
NetBT48_3: BT48.3 R47.1 | length 11.4
  Top Layer w0.4: v1(129,83.5) R47.1@129,84.275
  Bottom Layer w0.4: BT48.3@123,77.4 123,81 125.5,83.5 v1(129,83.5)
NetBT49_3: BT49.3 R48.1 | length 11.4
  Top Layer w0.4: v1(151,83.5) R48.1@151,84.275
  Bottom Layer w0.4: BT49.3@145,77.4 145,81 147.5,83.5 v1(151,83.5)
NetBT50_3: BT50.3 R49.1 | length 11.4
  Top Layer w0.4: v1(173,83.5) R49.1@173,84.275
  Bottom Layer w0.4: BT50.3@167,77.4 167,81 169.5,83.5 v1(173,83.5)
NetBT51_3: BT51.3 R50.1 | length 11.4
  Top Layer w0.4: v1(195,83.5) R50.1@195,84.275
  Bottom Layer w0.4: BT51.3@189,77.4 189,81 191.5,83.5 v1(195,83.5)
NetBT52_3: BT52.3 R51.1 | length 11.4
  Top Layer w0.4: v1(217,83.5) R51.1@217,84.275
  Bottom Layer w0.4: BT52.3@211,77.4 211,81 213.5,83.5 v1(217,83.5)
NetBT53_3: BT53.3 R52.1 | length 11.4
  Top Layer w0.4: v1(239,83.5) R52.1@239,84.275
  Bottom Layer w0.4: BT53.3@233,77.4 233,81 235.5,83.5 v1(239,83.5)
NetBT54_3: BT54.3 R53.1 | length 11.4
  Top Layer w0.4: v1(261,83.5) R53.1@261,84.275
  Bottom Layer w0.4: BT54.3@255,77.4 255,81 257.5,83.5 v1(261,83.5)
NetBT55_3: BT55.3 R54.1 | length 10.9
  Top Layer w0.4: v1(283.5,83.5) R54.1@283.5,84.275
  Bottom Layer w0.4: BT55.3@278,77.4 278,81 280.5,83.5 v1(283.5,83.5)
NetBT57_3: BT57.3 R70.2 | length 11.4
  Top Layer w0.4: v1(18,61.5) R70.2@18,62.25
  Bottom Layer w0.4: BT57.3@12,55.4 12,59 14.5,61.5 v1(18,61.5)
NetBT58_3: BT58.3 R57.1 | length 11.4
  Top Layer w0.4: v1(41,61.5) R57.1@41,62.25
  Bottom Layer w0.4: BT58.3@35,55.4 35,59 37.5,61.5 v1(41,61.5)
NetBT59_3: BT59.3 R58.1 | length 11.4
  Top Layer w0.4: v1(63,61.5) R58.1@63,62.25
  Bottom Layer w0.4: BT59.3@57,55.4 57,59 59.5,61.5 v1(63,61.5)
NetBT60_3: BT60.3 R59.1 | length 11.4
  Top Layer w0.4: v1(85,61.5) R59.1@85,62.25
  Bottom Layer w0.4: BT60.3@79,55.4 79,59 81.5,61.5 v1(85,61.5)
NetBT61_3: BT61.3 R60.1 | length 11.4
  Top Layer w0.4: v1(107,61.5) R60.1@107,62.246
  Bottom Layer w0.4: BT61.3@101,55.4 101,59 103.5,61.5 v1(107,61.5)
NetBT62_3: BT62.3 R61.1 | length 11.4
  Top Layer w0.4: v1(129,61.5) R61.1@129,62.25
  Bottom Layer w0.4: BT62.3@123,55.4 123,59 125.5,61.5 v1(129,61.5)
NetBT63_3: BT63.3 R62.1 | length 11.4
  Top Layer w0.4: v1(151,61.5) R62.1@151,62.275
  Bottom Layer w0.4: BT63.3@145,55.4 145,59 147.5,61.5 v1(151,61.5)
NetBT64_3: BT64.3 R63.1 | length 11.4
  Top Layer w0.4: v1(173,61.5) R63.1@173,62.275
  Bottom Layer w0.4: BT64.3@167,55.4 167,59 169.5,61.5 v1(173,61.5)
NetBT65_3: BT65.3 R64.1 | length 11.4
  Top Layer w0.4: v1(195,61.5) R64.1@195,62.275
  Bottom Layer w0.4: BT65.3@189,55.4 189,59 191.5,61.5 v1(195,61.5)
NetBT66_3: BT66.3 R65.1 | length 11.4
  Top Layer w0.4: v1(217,61.5) R65.1@217,62.275
  Bottom Layer w0.4: BT66.3@211,55.4 211,59 213.5,61.5 v1(217,61.5)
NetBT67_3: BT67.3 R66.1 | length 11.4
  Top Layer w0.4: v1(239,61.5) R66.1@239,62.275
  Bottom Layer w0.4: BT67.3@233,55.4 233,59 235.5,61.5 v1(239,61.5)
NetBT68_3: BT68.3 R67.1 | length 11.5
  Top Layer w0.4: v1(261,61.5) R67.1@261,62.275
  Bottom Layer w0.4: BT68.3@255,55.4 255.088,55.4 255.55,55.862 255.55,59.55 257.5,61.5 v1(261,61.5)
NetBT69_3: BT69.3 R68.1 | length 11.4
  Top Layer w0.4: v1(284,61.5) R68.1@284,62.275
  Bottom Layer w0.4: BT69.3@278,55.4 278,59 280.5,61.5 v1(284,61.5)
NetBT71_3: BT71.3 R84.2 | length 11.4
  Top Layer w0.4: v1(18,39.5) R84.2@18,40.275
  Bottom Layer w0.4: BT71.3@12,33.4 12,37 14.5,39.5 v1(18,39.5)
NetBT72_3: BT72.3 R71.1 | length 11.4
  Top Layer w0.4: v1(41,39.5) R71.1@41,40.25
  Bottom Layer w0.4: BT72.3@35,33.4 35,37 37.5,39.5 v1(41,39.5)
NetBT73_3: BT73.3 R72.1 | length 11.4
  Top Layer w0.4: v1(63,39.5) R72.1@63,40.25
  Bottom Layer w0.4: BT73.3@57,33.4 57,37 59.5,39.5 v1(63,39.5)
NetBT74_3: BT74.3 R73.1 | length 11.4
  Top Layer w0.4: v1(85,39.5) R73.1@85,40.234
  Bottom Layer w0.4: BT74.3@79,33.4 79,37 81.5,39.5 v1(85,39.5)
NetBT75_3: BT75.3 R74.1 | length 11.4
  Top Layer w0.4: v1(107,39.5) R74.1@107,40.25
  Bottom Layer w0.4: BT75.3@101,33.4 101,37 103.5,39.5 v1(107,39.5)
NetBT76_3: BT76.3 R75.1 | length 11.9
  Top Layer w0.4: v1(129,40) R75.1@129,40.75
  Bottom Layer w0.4: BT76.3@123,33.4 123,37.5 125.481,39.981 128.981,39.981 v1(129,40)
NetBT77_3: BT77.3 R76.1 | length 11.9
  Top Layer w0.4: v1(151,40) R76.1@151,40.775
  Bottom Layer w0.4: BT77.3@145,33.4 145,37.5 147.5,40 v1(151,40)
NetBT78_3: BT78.3 R77.1 | length 11.4
  Top Layer w0.4: v1(173,39.5) R77.1@173,40.231
  Bottom Layer w0.4: BT78.3@167,33.4 167,37 169.5,39.5 v1(173,39.5)
NetBT79_3: BT79.3 R78.1 | length 12.1
  Top Layer w0.4: v1(195,39.5) R78.1@195,40.275
  Bottom Layer w0.4: BT79.3@188.516,33.862 188.978,33.4 BT79.3@189,33.4 189,37 191.5,39.5 v1(195,39.5)
NetBT80_3: BT80.3 R79.1 | length 11.4
  Top Layer w0.4: v1(217,39.5) R79.1@217,40.275
  Bottom Layer w0.4: BT80.3@211,33.4 211,37 213.5,39.5 v1(217,39.5)
NetBT81_3: BT81.3 R80.1 | length 12.1
  Top Layer w0.4: v1(239,39.5) R80.1@239,40.275
  Bottom Layer w0.4: BT81.3@232.516,33.862 232.978,33.4 BT81.3@233,33.4 233,37 235.5,39.5 v1(239,39.5)
NetBT82_3: BT82.3 R81.1 | length 11.4
  Top Layer w0.4: v1(261,39.5) R81.1@261,40.275
  Bottom Layer w0.4: BT82.3@255,33.4 255,37 257.5,39.5 v1(261,39.5)
NetBT83_3: BT83.3 R82.1 | length 10.4
  Top Layer w0.4: v1(284,39.5) R82.1@284,40.275
  Bottom Layer w0.4: BT83.3@278,34.4 278,37 280.5,39.5 v1(284,39.5)
NetBT85_3: BT85.3 R98.2 | length 11.4
  Top Layer w0.4: v1(18,17.5) R98.2@18,18.225
  Bottom Layer w0.4: BT85.3@12,11.4 12,15 14.5,17.5 v1(18,17.5)
NetBT86_3: BT86.3 R85.1 | length 11.4
  Top Layer w0.4: v1(41,17.5) R85.1@41,18.25
  Bottom Layer w0.4: BT86.3@35,11.4 35,15 37.5,17.5 v1(41,17.5)
NetBT87_3: BT87.3 R86.1 | length 12
  Top Layer w0.4: v1(63,17.5) R86.1@63,18.25
  Bottom Layer w0.4: BT87.3@56.375,11.4 56.979,11.4 56.979,14.979 59.5,17.5 v1(63,17.5)
NetBT88_3: BT88.3 R87.1 | length 12.7
  Top Layer w0.4: v1(85,17.5) R87.1@85,18.25
  Bottom Layer w0.4: BT88.3@77.727,11.4 BT88.3@79,11.4 79,15 81.5,17.5 v1(85,17.5)
NetBT89_3: BT89.3 R88.1 | length 11.4
  Top Layer w0.4: v1(107,17.5) R88.1@107,18.25
  Bottom Layer w0.4: BT89.3@101,11.4 101,15 103.5,17.5 v1(107,17.5)
NetBT90_3: BT90.3 R89.1 | length 11.1
  Top Layer w0.4: v1(129,17.5) R89.1@129,18.225
  Bottom Layer w0.4: BT90.3@123,11.4 123,14.5 126,17.5 v1(129,17.5)
NetBT91_3: BT91.3 R90.1 | length 11.1
  Top Layer w0.4: v1(151,17.5) R90.1@151,18.25
  Bottom Layer w0.4: BT91.3@145,11.4 145,14.5 148,17.5 v1(151,17.5)
NetBT92_3: BT92.3 R91.1 | length 11.4
  Top Layer w0.4: v1(173,17.5) R91.1@173,18.25
  Bottom Layer w0.4: BT92.3@167,11.4 167,15 169.5,17.5 v1(173,17.5)
NetBT93_3: BT93.3 R92.1 | length 11.4
  Top Layer w0.4: v1(195,17.5) R92.1@195,18.25
  Bottom Layer w0.4: BT93.3@189,11.4 189,15 191.5,17.5 v1(195,17.5)
NetBT94_3: BT94.3 R93.1 | length 11.4
  Top Layer w0.4: v1(217,17.5) R93.1@217,18.25
  Bottom Layer w0.4: BT94.3@211,11.4 211,15 213.5,17.5 v1(217,17.5)
NetBT95_3: BT95.3 R94.1 | length 11.4
  Top Layer w0.4: v1(239,17.5) R94.1@239,18.25
  Bottom Layer w0.4: BT95.3@233,11.4 233,15 235.5,17.5 v1@239.046,17.5
NetBT96_3: BT96.3 R95.1 | length 11.4
  Top Layer w0.4: v1(261,17.5) R95.1@261,18.25
  Bottom Layer w0.4: BT96.3@255,11.4 255,15 257.5,17.5 v1(261,17.5)
NetBT97_3: BT97.3 R96.1 | length 11.4
  Top Layer w0.4: v1(284,17.5) R96.1@284,18.275
  Bottom Layer w0.4: BT97.3@278,11.4 278,15 280.5,17.5 v1(284,17.5)
NetBT99_3: BT99.3 R114.1 | length 6.9
  Top Layer w0.3: R114.1@253.725,182.1 BT99.3@260.6,182.1
NetBT100_3: BT100.3 R115.1 | length 26.1
  Top Layer w0.4: R115.1@228.225,194.5 228.225,204.725 230.6,207.1 BT100.3@243.1,207.1
NetBT101_3: BT101.3 R117.1 | length 6.9
  Top Layer w0.3: R117.1@218.725,182.1 BT101.3@225.6,182.1
NetU1_9: U1.9 U2.14 | length 20.1
  Top Layer w0.4: v1(16.445,164) U1.9@16.445,165.7 ; U2.14@33.095,165.7 v1(33.095,164) v1@33.132,164
  Bottom Layer w0.4: v1(16.445,164) v1(33.095,164)
NetU2_9: U2.9 U3.14 | length 19
  Top Layer w0.4: v1(39.445,164) U2.9@39.445,165.7 ; v1(55.095,164) U3.14@55.095,165.7
  Bottom Layer w0.4: v1(39.445,164) v1(55.095,164)
NetU3_9: U3.9 U4.14 | length 19
  Top Layer w0.4: v1(61.445,164) U3.9@61.445,165.7 ; v1(77.095,164) U4.14@77.095,165.7
  Bottom Layer w0.4: v1(61.445,164) v1(77.095,164)
NetU4_9: U4.9 U5.14 | length 19
  Top Layer w0.4: v1(83.445,164) U4.9@83.445,165.7 ; v1(99.095,164) U5.14@99.095,165.7
  Bottom Layer w0.4: v1(83.445,164) v1(99.095,164)
NetU5_9: U5.9 U6.14 | length 19
  Top Layer w0.4: v1(105.445,164) U5.9@105.445,165.7 ; v1(121.095,164) U6.14@121.095,165.7
  Bottom Layer w0.4: v1(105.445,164) v1(121.095,164)
NetU6_9: U6.9 U7.14 | length 19
  Top Layer w0.4: v1(127.445,164) U6.9@127.445,165.7 ; v1(143.095,164) U7.14@143.095,165.7
  Bottom Layer w0.4: v1(127.445,164) v1(143.095,164)
NetU7_9: U7.9 U8.14 | length 19.1
  Top Layer w0.4: v1(149.445,164) U7.9@149.445,165.7 ; v1(165.095,164) U8.14@165.095,165.7
  Bottom Layer w0.4: v1(149.445,164) v1(165.095,164)
NetU8_9: U8.9 U9.14 | length 19.1
  Top Layer w0.4: v1(171.445,164) U8.9@171.445,165.7 ; v1(187.095,164) U9.14@187.095,165.7
  Bottom Layer w0.4: v1(171.445,164) v1(187.095,164)
NetU9_9: U9.9 U10.14 | length 19.1
  Top Layer w0.4: v1(193.445,163.975) U9.9@193.445,165.7 ; v1(209.095,164) U10.14@209.095,165.7
  Bottom Layer w0.4: v1(193.445,163.975) 193.458,163.987 209.082,163.987 v1(209.095,164)
NetU10_9: U10.9 U11.14 | length 19
  Top Layer w0.4: v1(215.445,164) U10.9@215.445,165.7 ; v1(231.095,164) U11.14@231.095,165.7
  Bottom Layer w0.4: v1(215.445,164) v1(231.095,164)
NetU11_9: U11.9 U12.14 | length 19.1
  Top Layer w0.4: U11.9@237.445,165.7 237.445,164.055 v1@237.5,164 ; v1(253.095,164) U12.14@253.095,165.7
  Bottom Layer w0.4: v1(237.445,164) v1(253.095,164)
NetU12_9: U12.9 U13.14 | length 21
  Top Layer w0.4: v1(259.445,164) U12.9@259.445,165.7 ; v1(277.095,164) U13.14@277.095,165.7
  Bottom Layer w0.4: v1(259.445,164) v1(277.095,164)
SET: BT99.1 C29.1 H1.14 R113.1 | length 156.7
  Top Layer w0.3: v1(133,193) 133,203 133.17,203.17 H1.14@133.17,213.73 ; v1(260.6,193) C29.1@261.75,193 R113.1@261.75,191.5 261.75,188.75 262.5,188 BT99.1@262.5,186.15
  Bottom Layer w0.3: v1(133,193) v1(260.6,193)
SLK: H1.10 U1.11 U2.11 U3.11 U4.11 U5.11 U6.11 U7.11 U8.11 U9.11 U10.11 U11.11 U12.11 U13.11 | length 355.4
  Top Layer w0.3: H1.10@128.09,213.73 128.09,172.41 130,170.5 v1(130,169)
  Top Layer w0.4: U1.11@13.905,165.7 v1(13.905,169) ; U2.11@36.905,165.7 v1(36.905,169) ; U3.11@58.905,165.7 v1@58.905,169 ; U4.11@80.905,165.7 v1(80.905,169) ; U5.11@102.905,165.7 v1(102.905,169) ; U6.11@124.905,165.7 v1(124.905,169) ; U7.11@146.905,165.7 v1(146.905,169) ; U8.11@168.905,165.7 v1(168.905,169) ; U9.11@190.905,165.7 v1(190.905,169) ; U10.11@212.905,165.7 v1(212.905,169) ; U11.11@234.905,165.7 v1(234.905,169) ; U12.11@256.905,165.7 v1(256.905,169) ; U13.11@280.905,165.7 280.905,168.595 280.904,168.596 280.904,168.999 v1(280.905,169)
  Bottom Layer w0.4: v1(13.905,169) v1(36.905,169) v1(58.903,169) v1(80.905,169) v1(102.905,169) 118.5,169 v1(124.905,169) 146.878,169 v1(168.905,169) v1(190.905,169) v1(212.905,169) v1(234.905,169) v1(256.905,169) v1(280.905,169)
STOP: BT101.1 C30.1 H1.18 R116.1 | length 118.6
  Top Layer w0.3: H1.18@138.25,213.73 138.25,194.65 138.5,194.4 v1(138.5,191) ; v1(225.5,191) 226.225,191 226.725,191.5 R116.1@226.75,191.5 ; C30.1@226.75,193 R116.1@226.75,191.5 ; BT101.1@227.5,186.15 227.258,186.15 226.75,186.658 R116.1@226.75,191.5
  Bottom Layer w0.3: v1(138.5,191) v1(225.5,191)
STR: H1.8 U1.12 U2.12 U3.12 U4.12 U5.12 U6.12 U7.12 U8.12 U9.12 U10.12 U11.12 U12.12 U13.12 | length 367.4
  Top Layer w0.3: v1(123.635,170) 123.635,195.435 125.55,197.35 H1.8@125.55,213.73
  Top Layer w0.4: U1.12@12.635,165.7 v1(12.635,170) ; U2.12@35.635,165.7 v1(35.635,170) ; U3.12@57.635,165.7 v1(57.635,170) ; U4.12@79.635,165.7 v1(79.635,170) ; U5.12@101.635,165.7 v1(101.635,170) ; U6.12@123.635,165.7 v1(123.635,170) ; U7.12@145.635,165.7 v1(145.635,170) ; U8.12@167.635,165.7 v1(167.635,170) ; U9.12@189.635,165.7 v1(189.635,170) ; U10.12@211.635,165.7 v1(211.635,170) ; U11.12@233.635,165.7 v1(233.635,170) ; U12.12@255.635,165.7 v1(255.635,170) ; U13.12@279.635,165.7 v1(279.635,170)
  Bottom Layer w0.4: v1(12.635,170) v1(35.635,170) v1(57.635,170) v1(79.635,170) v1(101.635,170) v1(123.635,170) v1(145.635,170) v1(167.635,170) v1(189.635,170) v1(211.635,170) v1(233.635,170) v1(255.635,170) v1(279.635,170)
V_MCU: C1.2 C2.2 C3.2 C4.2 C5.2 C6.2 C7.2 C8.2 C9.2 C10.2 C11.2 C12.2 C13.2 C15.2 C16.2 C17.2 C18.2 C19.2 C20.2 C21.2 C22.2 C23.2 C24.2 C25.2 C26.2 C27.2 H1.1 H1.2 R99.1 R100.1 R101.1 R102.1 R103.1 R104.1 R105.1 R106.1 R107.1 R108.1 R109.1 R110.1 R112.1 R113.2 R116.2 U1.10 U1.16 U2.10 U2.16 U3.10 U3.16 U4.10 U4.16 U5.10 U5.16 U6.10 U6.16 U7.10 U7.16 U8.10 U8.16 U9.10 U9.16 U10.10 U10.16 U11.10 U11.16 U12.10 U12.16 U13.10 U13.16 | length 944.4
  Top Layer w0.4: v1(6,167.5) C1.2@6,165.75 7.505,165.75 U1.16@7.555,165.7 ; U1.10@15.175,165.975 v1(15.175,167.5) ; v1(29,167.5) C2.2@29,165.75 29.05,165.7 29.1,165.75 30.505,165.75 U2.16@30.555,165.7 ; U2.10@38.175,165.7 v1(38.175,167.5) ; v1(51,167.5) C3.2@51,165.75 52.505,165.75 U3.16@52.555,165.7 ; U3.10@60.175,165.7 v1(60.175,167.5) ; v1(73,167.5) C4.2@73,165.75 74.23,165.75 ; U4.10@82.175,165.77 v1(82.175,167.5) ; v1(95,167.5) C5.2@95,165.75 96.505,165.75 U5.16@96.555,165.7 ; U5.10@104.175,165.7 v1(104.175,167.5) 104.175,182.175 117.93,195.93 H1.2@117.93,213.73 H1.1@117.93,216.27 ; v1(117,167.5) C6.2@117,165.75 118.505,165.75 U6.16@118.555,165.7 ; U6.10@126.175,165.975 v1(126.175,167.5) ; v1(139,167.5) C7.2@139,165.75 140.505,165.75 U7.16@140.555,165.7 ; U7.10@148.175,166.158 v1(148.175,167.5) ; v1(161,167.5) C8.2@161,165.75 162.505,165.75 U8.16@162.555,165.7 ; U8.10@170.175,165.7 v1(170.175,167.5) ; v1(183,167.5) C9.2@183,165.75 184.505,165.75 U9.16@184.555,165.7 ; U9.10@192.175,166.364 v1(192.175,167.5) ; v1(205,167.5) C10.2@205,165.75 206.505,165.75 U10.16@206.555,165.7 ; U10.10@214.175,165.7 v1(214.175,167.5) ; v1(227,167.5) C11.2@227,165.75 228.505,165.75 U11.16@228.555,165.7 ; v1(249,167.5) C12.2@249,165.75 250.505,165.75 U12.16@250.555,165.7 ; U12.10@258.175,165.7 v1(258.175,167.5) ; v1(273,167.5) C13.2@273,165.75 274.505,165.75 U13.16@274.555,165.7 ; U13.10@282.175,165.7 v1(282.175,167.5)
  Top Layer w0.5: v1(6,167.5) 5,167.5 4,166.5 4,3 9.5,-2.5 11.25,-2.5 ; C15.2@11.25,0.5 R112.1@11.25,-1 11.25,-2.5 ; C16.2@34.25,0.5 R99.1@34.25,-1 34.25,-2.5 ; C17.2@56.25,0.5 R100.1@56.25,-1 56.25,-2.5 ; C18.2@78.25,0.5 R101.1@78.25,-1 78.25,-2.5 ; C19.2@100.25,0.5 R102.1@100.25,-1 100.25,-2.5 ; C20.2@122.25,0.5 R103.1@122.25,-1 122.25,-2.5 ; C21.2@144.25,0.5 R104.1@144.25,-1 144.25,-2.5 ; C22.2@166.25,0.5 R105.1@166.25,-1 166.25,-2.5 ; C23.2@188.25,0.5 R106.1@188.25,-1 188.25,-2.5 ; C24.2@210.25,0.5 R107.1@210.25,-1 210.25,-2.5 ; R116.2@228.25,191.5 228.275,191.5 228.5,191.275 228.5,191.25 236.175,183.575 U11.10@236.175,165.7 ; C25.2@232.25,0.5 R108.1@232.25,-1 232.25,-2.5 ; C26.2@254.25,0.5 R109.1@254.25,-1 254.25,-2.5 ; R113.2@263.25,191.5 263.275,191.5 263.5,191.275 263.5,191.25 282.175,172.575 v1(282.175,167.5) ; R110.1@277.225,-1 275.725,-2.5 254.25,-2.5 ; R110.1@277.25,-0.775 C27.2@277.25,0.5 ; 11.25,-2.5 34.25,-2.5 ; 34.25,-2.5 56.25,-2.5 ; 56.25,-2.5 78.25,-2.5 ; 78.25,-2.5 81.5,-2.5 88,4 92,4 98.5,-2.5 100.25,-2.5 ; 100.25,-2.5 122.25,-2.5 ; 122.25,-2.5 144.25,-2.5 ; 144.25,-2.5 166.25,-2.5 ; 166.25,-2.5 188.25,-2.5 ; 188.25,-2.5 191.5,-2.5 198,4 202,4 208.5,-2.5 210.25,-2.5 ; 210.25,-2.5 232.25,-2.5 ; 232.25,-2.5 254.25,-2.5
  Bottom Layer w0.5: v1(6,167.5) v1(15.175,167.5) v1(29,167.5) v1(38.175,167.5) v1(51,167.5) v1(60.175,167.5) v1(73,167.5) v1(82.175,167.5) v1(95,167.5) v1(104.175,167.5) v1(117,167.5) v1(126.175,167.5) v1(139,167.5) v1(148.175,167.5) v1(161,167.5) v1(170.175,167.5) v1(183,167.5) v1(192.175,167.5) v1(205,167.5) v1(214.175,167.5) v1(227,167.5) v1(236.175,167.5) v1(249,167.5) v1(258.175,167.5) v1(273,167.5) v1@282.1,167.5
pads on no net: H1.24 H1.26 H1.28 H1.30 H1.31 H1.32 H1.34 H1.36 H1.38 U1.7 U2.7 U3.7 U4.7 U5.7 U6.7 U7.7 U8.7 U9.7 U10.7 U11.7 U12.7 U13.7 U13.9
copper on no net:
  other v2: 12,9.5 35,9.5

## Polygon pours and split planes (outlines as drawn)
GND on Bottom Layer "NONET_L-01_P-001" (solid, pour order 1): -5.15,-0.003 cw(c-5.034,-0.003) -5.15,-0.002 cw(c-3.863,-0.001) -5.15,0 -5.15,0.003 -5.15,216.6 cw(c0,216.6) 0,221.75 cw(c0,221.601) 0.015,221.75 cw(c0.03,221.6) 0.03,221.75 290,221.75 cw(c290,221.653) 290.002,221.75 cw(c290,216.6) 295.15,216.6 cw(c295.009,216.6) 295.15,216.595 295.15,0.005 cw(c295,0) 295.15,0 cw(c290,0) 290,-5.15 cw(c290,-5) 289.997,-5.15 0,-5.15 ccw(c0.002,-5) 0.003,-5.15 0,-5.15 cw(c0,0)
GND on Top Layer "NONET_L-01_P-001" (solid, pour order 0): -5.15,-0.003 cw(c-5.034,-0.003) -5.15,-0.002 cw(c-3.863,-0.001) -5.15,0 -5.15,0.003 -5.15,216.6 cw(c0,216.6) 0,221.75 cw(c0,221.601) 0.015,221.75 cw(c0.03,221.6) 0.03,221.75 290,221.75 cw(c290,221.653) 290.002,221.75 cw(c290,216.6) 295.15,216.6 cw(c295.009,216.6) 295.15,216.595 295.15,0.005 cw(c295,0) 295.15,0 cw(c290,0) 290,-5.15 cw(c290,-5) 289.997,-5.15 0,-5.15 ccw(c0.002,-5) 0.003,-5.15 0,-5.15 cw(c0,0)

## Keep-outs
Keep-Out Layer:
  lines w0.3: 0,221.6 ccw(c0,216.6) -5,216.6 -5,0 ; 0.03,221.6 290,221.6 cw(c290,216.6) 295,216.6 295,0 cw(c290,0) 290,-5 0,-5 cw(c0,0) -5,0 ; -5,0 -5,0 ; 30,177.5 ccw(c32,177.5) 32,175.5 60,175.5 ccw(c60,177.5) 62,177.5 62,205.5 ccw(c60,205.5) 60,207.5 32,207.5 ccw(c32,205.5) 30,205.5 30,177.5 ; 30,177.5 30,177.5

## Silkscreen, mask and mechanical layers (free items; w line width, h text height)
Mechanical 1:
  circle w0.3: c278,141.5 r7.25
  circle w0.3: c278,97.5 r7.25
  circle w0.3: c278,53.5 r7.25
  circle w0.3: c278,9.5 r7.25
  circle w0.3: c255,119.5 r7.25
  circle w0.3: c255,75.5 r7.25
  circle w0.3: c255,31.5 r7.25
  circle w0.3: c233,141.5 r7.25
  circle w0.3: c233,97.5 r7.25
  circle w0.3: c233,53.5 r7.25
  circle w0.3: c233,9.5 r7.25
  circle w0.3: c211,119.5 r7.25
  circle w0.3: c211,75.5 r7.25
  circle w0.3: c211,31.5 r7.25
  circle w0.3: c189,141.5 r7.25
  circle w0.3: c189,97.5 r7.25
  circle w0.3: c189,53.5 r7.25
  circle w0.3: c189,9.5 r7.25
  circle w0.3: c167,119.5 r7.25
  circle w0.3: c167,75.5 r7.25
  circle w0.3: c167,31.5 r7.25
  circle w0.3: c145,141.5 r7.25
  circle w0.3: c145,97.5 r7.25
  circle w0.3: c145,53.5 r7.25
  circle w0.3: c145,9.5 r7.25
  circle w0.3: c123,119.5 r7.25
  circle w0.3: c123,75.5 r7.25
  circle w0.3: c123,31.5 r7.25
  circle w0.3: c101,141.5 r7.25
  circle w0.3: c101,97.5 r7.25
  circle w0.3: c101,53.5 r7.25
  circle w0.3: c101,9.5 r7.25
  circle w0.3: c79,119.5 r7.25
  circle w0.3: c79,75.5 r7.25
  circle w0.3: c79,31.5 r7.25
  circle w0.3: c57,141.5 r7.25
  circle w0.3: c57,97.5 r7.25
  circle w0.3: c57,53.5 r7.25
  circle w0.3: c57,9.5 r7.25
  circle w0.3: c12,119.5 r7.25
  circle w0.3: c12,75.5 r7.25
  circle w0.3: c12,31.5 r7.25
  circle w0.3: c35,119.5 r7.25
  circle w0.3: c35,75.5 r7.25
  circle w0.3: c35,31.5 r7.25
  circle w0.3: c12,9.5 r7.25
  circle w0.3: c35,9.5 r7.25
  circle w0.3: c35,53.5 r7.25
  circle w0.3: c35,97.5 r7.25
  circle w0.3: c35,141.5 r7.25
  circle w0.3: c12,53.5 r7.25
  circle w0.3: c12,97.5 r7.25
  circle w0.3: c12,141.5 r7.25
  circle w0.3: c57,31.5 r7.25
  circle w0.3: c57,75.5 r7.25
  circle w0.3: c57,119.5 r7.25
  circle w0.3: c79,9.5 r7.25
  circle w0.3: c79,53.5 r7.25
  circle w0.3: c79,97.5 r7.25
  circle w0.3: c79,141.5 r7.25
  circle w0.3: c101,31.5 r7.25
  circle w0.3: c101,75.5 r7.25
  circle w0.3: c101,119.5 r7.25
  circle w0.3: c123,9.5 r7.25
  circle w0.3: c123,53.5 r7.25
  circle w0.3: c123,97.5 r7.25
  circle w0.3: c123,141.5 r7.25
  circle w0.3: c145,31.5 r7.25
  circle w0.3: c145,75.5 r7.25
  circle w0.3: c145,119.5 r7.25
  circle w0.3: c167,9.5 r7.25
  circle w0.3: c167,53.5 r7.25
  circle w0.3: c167,97.5 r7.25
  circle w0.3: c167,141.5 r7.25
  circle w0.3: c189,31.5 r7.25
  circle w0.3: c189,75.5 r7.25
  circle w0.3: c189,119.5 r7.25
  circle w0.3: c211,9.5 r7.25
  circle w0.3: c211,53.5 r7.25
  circle w0.3: c211,97.5 r7.25
  circle w0.3: c211,141.5 r7.25
  circle w0.3: c233,31.5 r7.25
  circle w0.3: c233,75.5 r7.25
  circle w0.3: c233,119.5 r7.25
  circle w0.3: c255,9.5 r7.25
  circle w0.3: c255,53.5 r7.25
  circle w0.3: c255,97.5 r7.25
  circle w0.3: c255,141.5 r7.25
  circle w0.3: c278,31.5 r7.25
  circle w0.3: c278,75.5 r7.25
  circle w0.3: c278,119.5 r7.25
  circle w0.3: c290,0 r1.75
  circle w0.3: c245,208.1 r8
  circle w0.3: c290,216.6 r1.75
  circle w0.3: c225,181.1 r8
  circle w0.3: c265,181.1 r8
Mechanical 3:
  drawing of 312 lines, arcs and shapes, not listed

## Dimensions
0,86.5 to 0,216.6 on Mechanical 1
90,0 to 200,0 on Mechanical 1
0,0 to 90,0 on Mechanical 1